# Altium PCB P8.PcbDoc (part 1 of 2)
Units mil, origin at the board's own origin, x right, y up, seen from the top; angles counter-clockwise.
Board outline 3346.46 x 1968.5 mil, 4 copper layers (Top Layer, MidLayer1, Mid-Layer 2, Bottom Layer); 75 components, 59 nets, 241 pads, 150 vias.
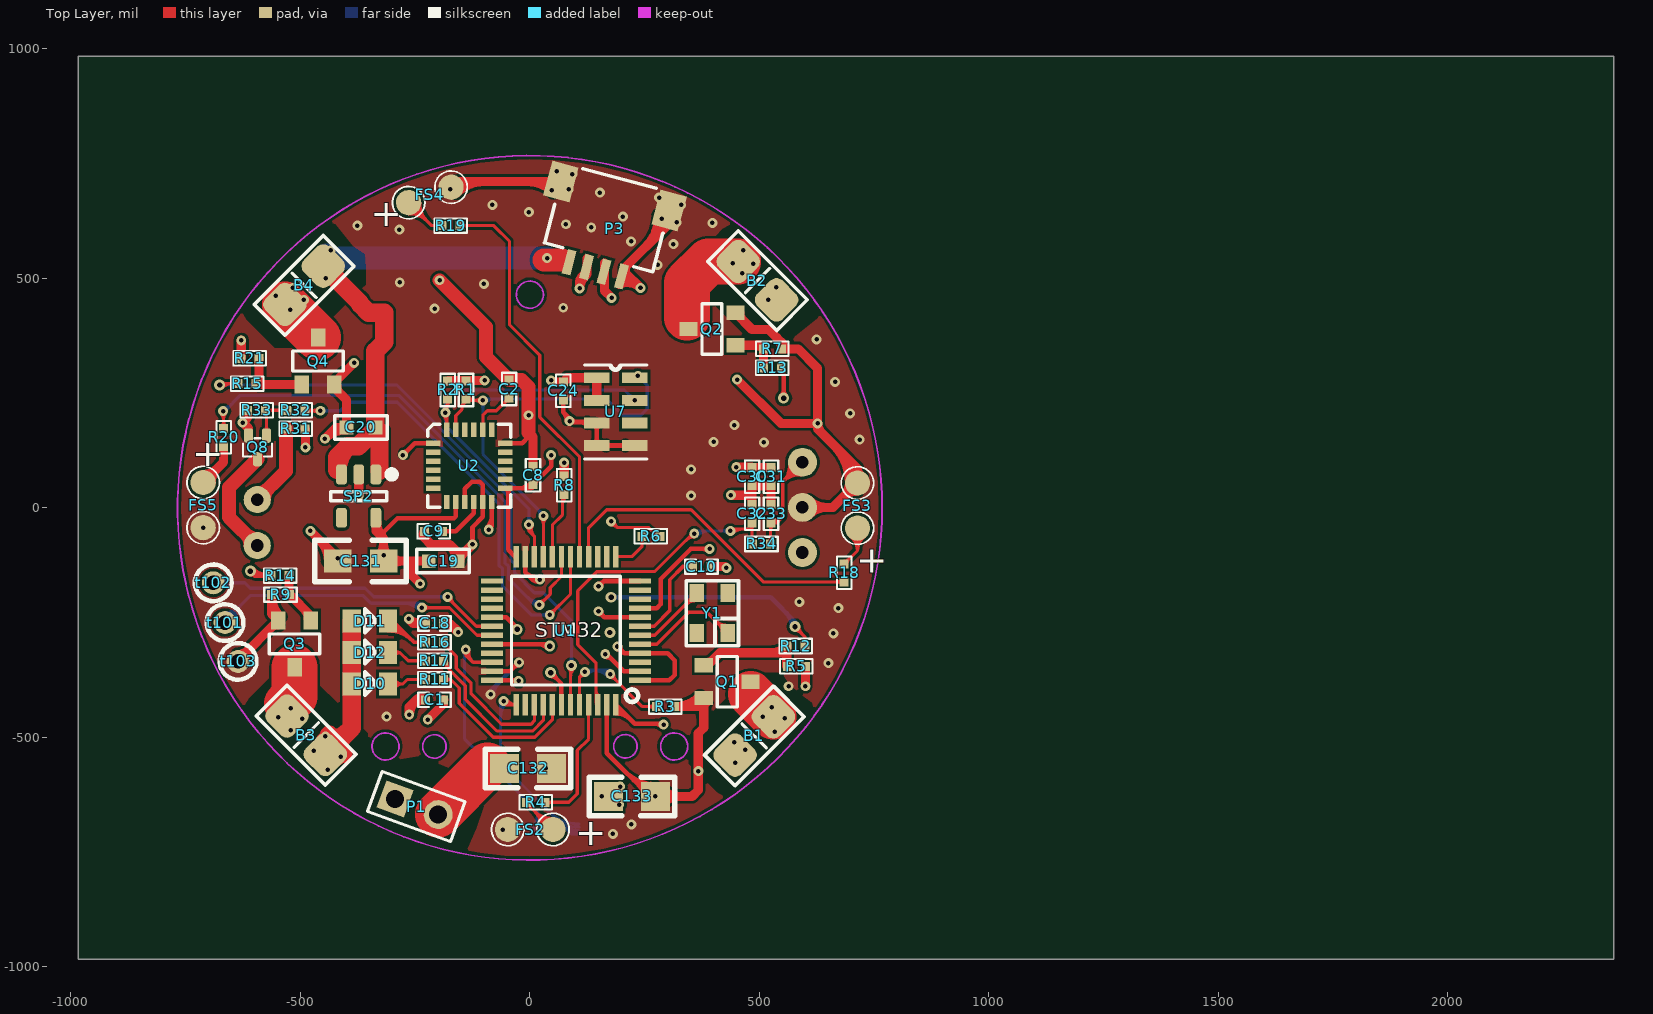
[diagram p0: Top Layer view]
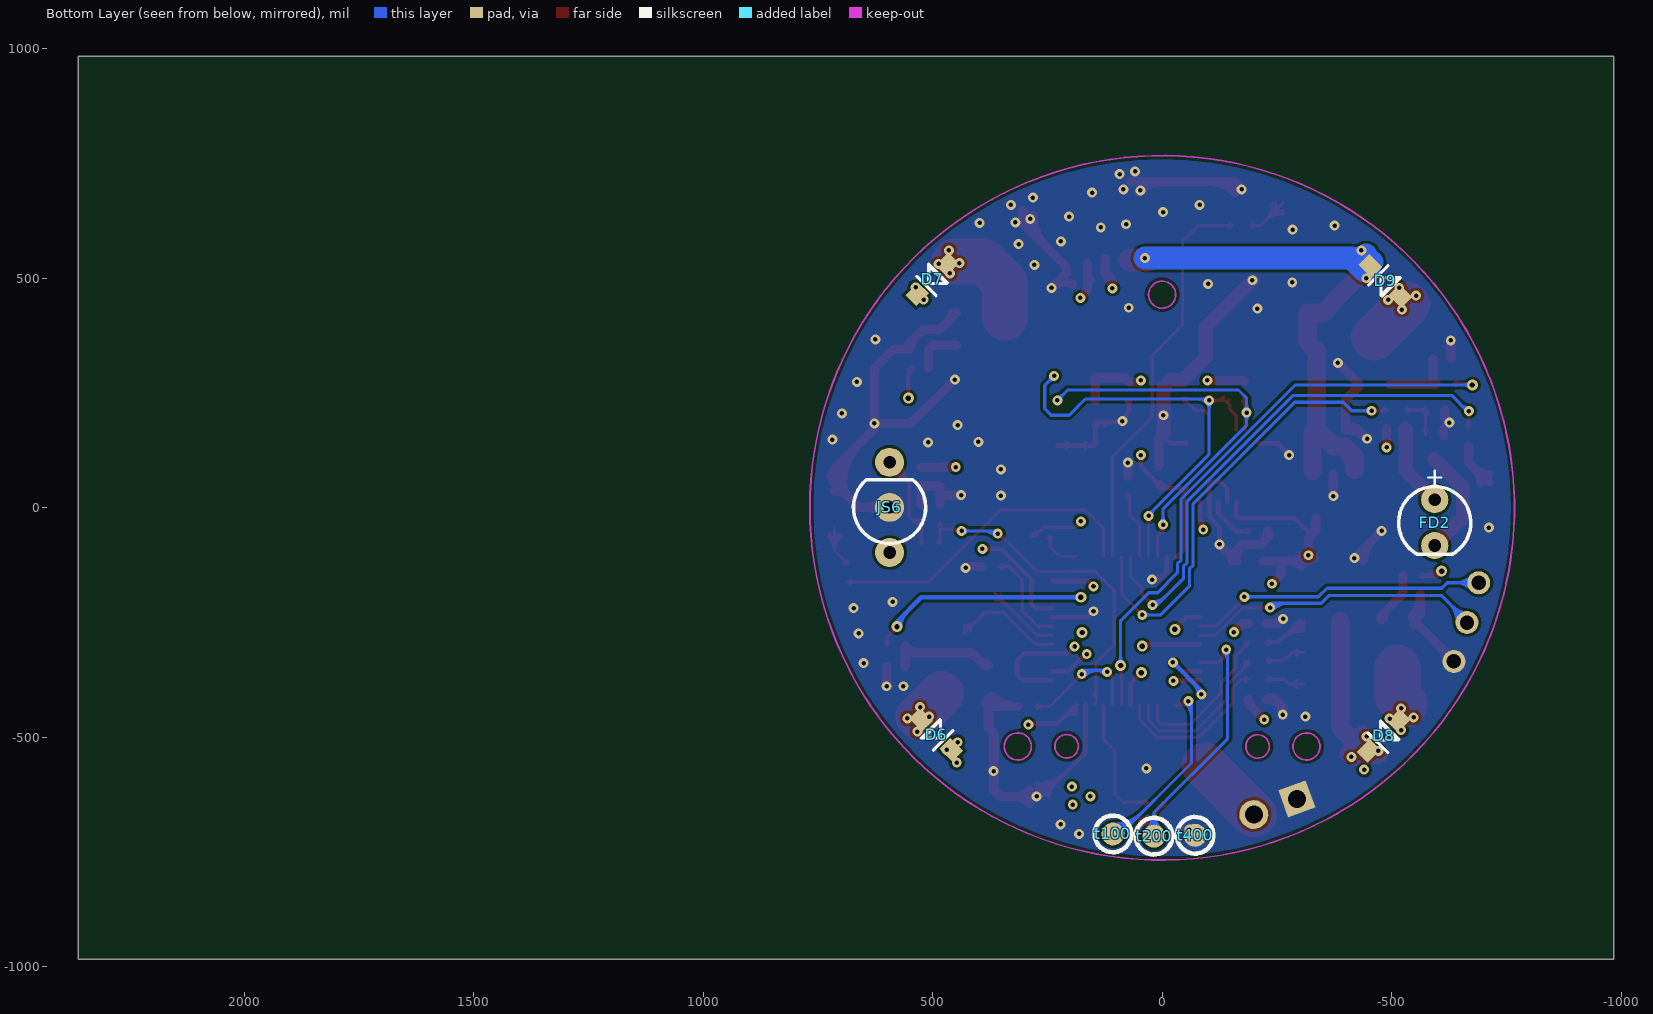
[diagram p1: Bottom Layer view, seen from below]
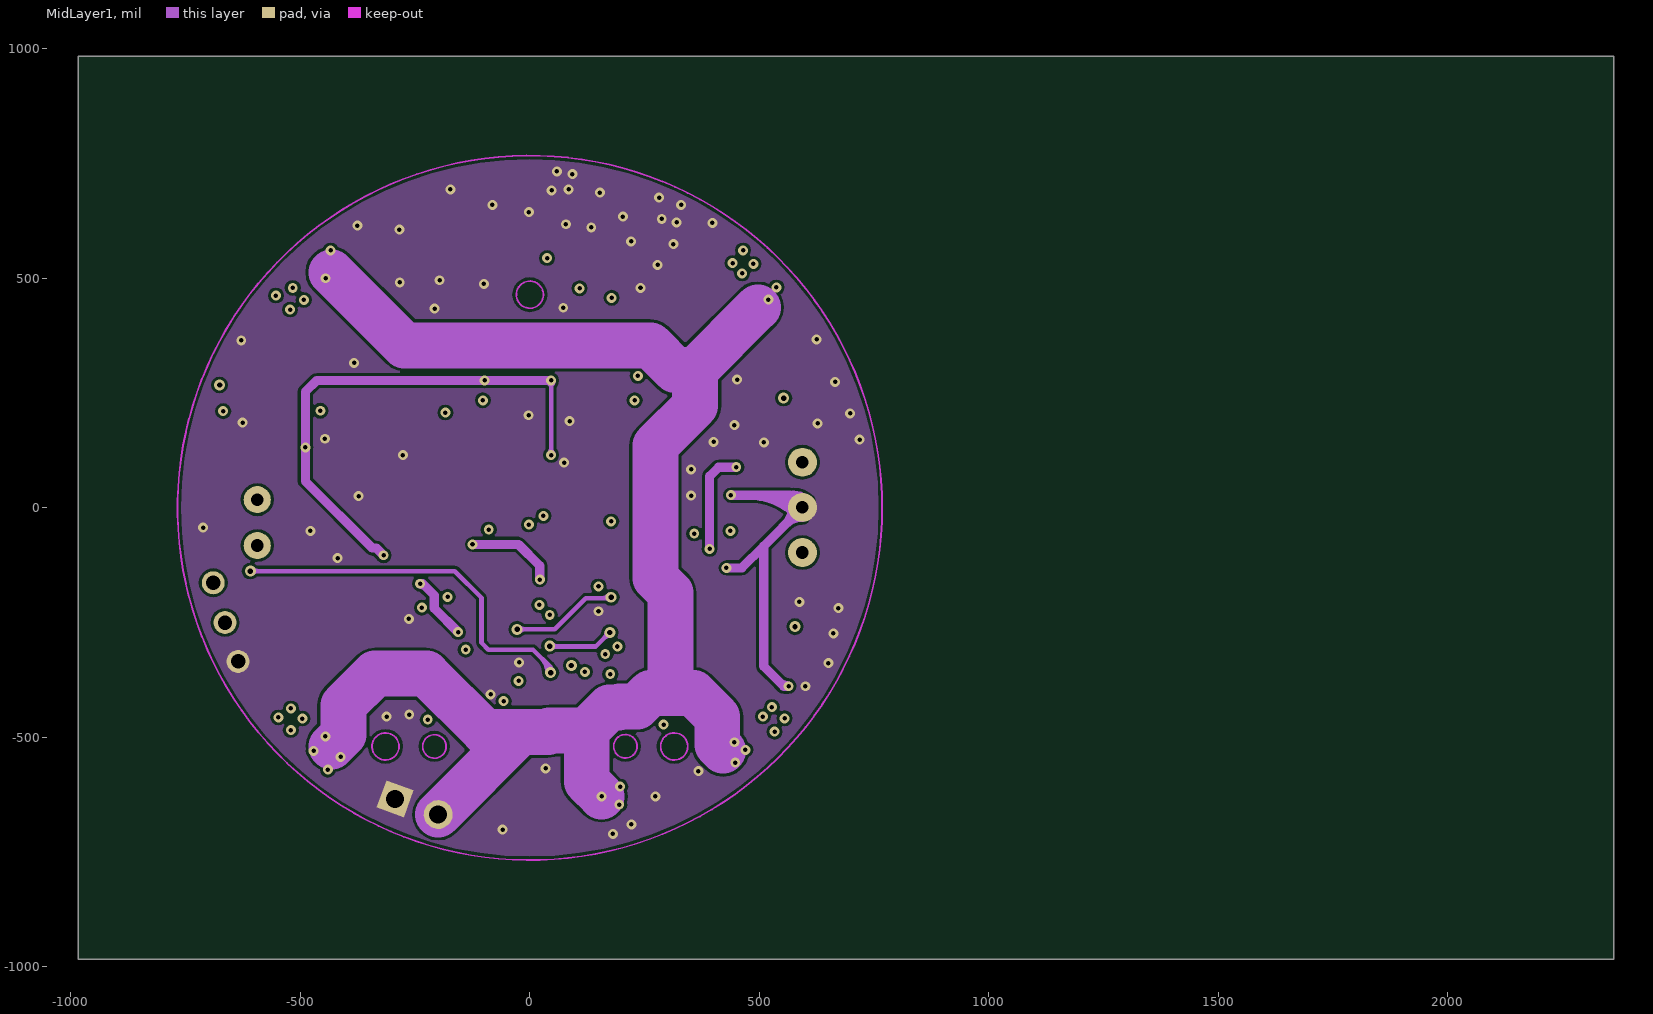
[diagram p2: MidLayer1]
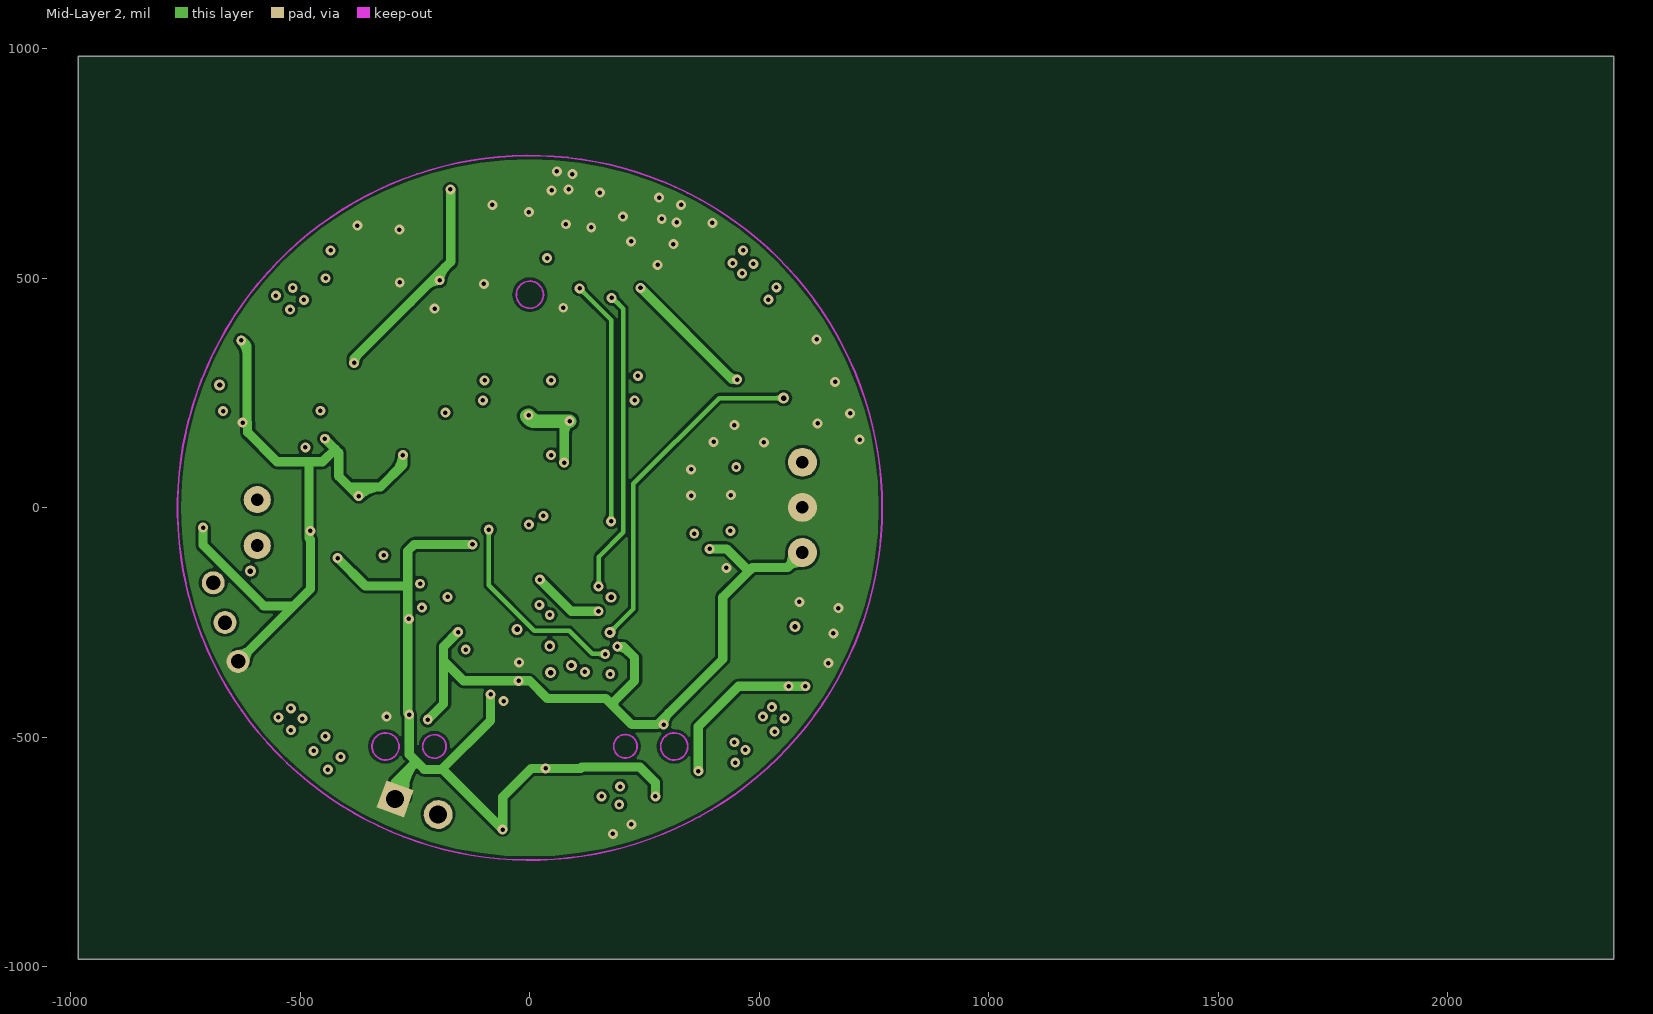
[diagram p3: Mid-Layer 2]

## Layer stack, top to bottom
Top Layer: signal copper 1.4
Dielectric: core 12.6, FR-4, Dk 4.8
MidLayer1: signal copper 1.4
Dielectric: prepreg 12.6, FR-4, Dk 4.8
Mid-Layer 2: signal copper 1.4
Dielectric: core 12.6, FR-4, Dk 4.8
Bottom Layer: signal copper 1.4

## Board outline
-984.25,984.25 2362.2,984.25 2362.2,-984.25 -984.25,-984.25

## Design rules (kind name [scope] priority, off if disabled: settings)
Clearance [All] p1: gap=6
ComponentClearance [All] p1: gap=0 collisioncheckmode=3 verticalgap=0 showdistances=FALSE
HoleToHoleClearance [All] p1: gap=0 allowstackedmicrovias=FALSE
MinimumSolderMaskSliver [All] p1: minsoldermaskwidth=0
PlaneConnect [All] p1: planeconnectstyle=Direct reliefexpansion=20 reliefentries=4 reliefconductorwidth=10 reliefairgap=10
PolygonConnect [All] p1: connectstyle=Direct reliefconductorwidth=10 reliefentries=4 polygonreliefangle="90 Angle" airgapwidth=10
RoutingVias [All] p1: holewidth=9.84 width=21.65 viastyle="Through Hole" minholewidth=9.84 minwidth=21.65 maxholewidth=19.68 maxwidth=59.06
SilkToSilkClearance [All] p1: silktosilkclearance=0
SilkToSolderMaskClearance [IsPad] p1: minsilkscreentomaskgap=0 clearancetoexposedcopper=TRUE
SolderMaskExpansion [All] p1: expansion=4
Width [All] p1: maxlimit=100 minlimit=7 preferedwidth=10 toplayer_prefwidth=7 midlayer1_minwidth=10 midlayer2_minwidth=10 bottomlayer_prefwidth=7 minimp=50.000000 maximp=50.000000 favimp=50.000000
22 further rules are at their usual default settings.

## Components (designator, comment, footprint, x,y, rotation, side; value= is the part's Value field where it differs from the comment)
B1 "Motor" Motor-3.0 489.02,-497.01 r225 top
B2 "Motor" Motor-3.0 495.98,495 r135 top
B3 "Motor" Motor-3.0 -487.48,-495.39 r135 top
B4 "Motor" Motor-3.0 -492.01,485 r45 top
C1 "104" C-0402 -207.68,-418.31 r0 top
C2 "C2.2nF" C-0402 -45.28,258.86 r90 top
C8 "104" C-0402 6.89,70.87 r270 top
C9 "104" C-0402 -209.65,-51.18 r0 top
C10 "C1uF" C-0402 374.02,-127.95 r0 top
C18 "104" C-0402 -207.68,-251.97 r0 top
C19 "C10uF" 0603C -220.47,-116.14 r0 top
C20 "C1uF" 0603C -399.61,175.2 r0 top
C24 "C0.1uF" C-0402 72.83,254.92 r90 top
C30 "2.2uF" C-0402 484.25,67.91 r270 top
C31 "100nF" C-0402 525.58,67.91 r270 top
C32 "2.2nF" C-0402 484.26,-12.8 r90 top
C33 "2.2nF" C-0402 525.59,-12.8 r90 top
C131 "22uF" 0805 -318.9,-116.14 r180 top
C132 "100uF" 1206 -55.12,-567.91 r0 top
C133 "100uF" 1206 171.26,-628.94 r0 top
D6 "BAT54WS" LC-SOD-323F 492.13,-494.09 r45 bottom
D7 "BAT54WS" LC-SOD-323F 500.98,498.03 r135 bottom
D8 "BAT54WS" LC-SOD-323F -483.27,-497.05 r135 bottom
D9 "BAT54WS" LC-SOD-323F -486.22,494.09 r225 bottom
D10 "LED-B" LED -387.79,-383.86 r0 top
D11 "LED-R" LED -387.79,-247.05 r0 top
D12 "LED-G" LED -387.79,-315.45 r0 top
FD2 "" LED-3 -594.02,-32.12 r270 bottom locked
FS2 "LED-RS" PAD-2 0.98,-700.98 r180 top
FS3 "LED-RS" PAD-2 714.02,5 r90 top
FS4 "LED-RS" PAD-2 -217.95,682.01 r20 top
FS5 "LED-RS" PAD-2 -712.01,5.98 r270 top
JS6 "LF0038G" LED-CA 594.02,0.98 r90 bottom locked
P1 "Head2" HEAD2 -199.8,-668.31 r70 top
P3 "Head*4" B2BC-1.0-4P 267.72,514.76 r75 top
Q1 "SI2302" SOT-23-3 378.94,-343.5 r270 top
Q2 "SI2302" SOT-23-3 447.83,354.33 r90 top
Q3 "SI2302" SOT-23-3 -477.36,-245.08 r180 top
Q4 "SI2302" SOT-23-3 -497.05,268.7 r0 top
Q8 "MMBT2222AT" SOT-523 -593.5,131.89 r180 top
R1 "R10K" R-0402 -139.27,256.89 r90 top
R2 "R10K" R-0402 -179.13,256.89 r90 top
R3 "R10K" R-0402 295.28,-433.07 r0 top
R4 "180R" R-0402 12.8,-641.73 r0 top
R5 "R10K" R-0402 580.71,-345.47 r0 top
R6 "R220" R-0402 263.78,-62.01 r180 top
R7 "R10K" R-0402 528.54,346.46 r180 top
R8 "R10K" R-0402 74.8,49.21 r270 top
R9 "R10K" R-0402 -543.31,-188.98 r0 top
R11 "R2K" R-0402 -207.68,-374.02 r0 top
R12 "R100R" R-0402 579.72,-301.18 r0 top
R13 "R100R" R-0402 528.54,305.12 r0 top
R14 "R100R" R-0402 -544.29,-147.64 r180 top
R15 "R100R" R-0402 -616.14,270.67 r180 top
R16 "R2K" R-0402 -207.68,-292.65 r0 top
R17 "R2K" R-0402 -207.68,-333.33 r0 top
R18 "180R" R-0402 685.04,-141.73 r270 top
R19 "180R" R-0402 -172.24,615.16 r0 top
R20 "180R" R-0402 -667.32,153.54 r90 top
R21 "R10K" R-0402 -610.24,325.79 r0 top
R31 "22R" R-0402 -509.84,172.25 r0 top
R32 "2.2K" R-0402 -509.84,212.6 r180 top
R33 "10K" R-0402 -595.47,212.6 r0 top
R34 "100R" R-0402 504.92,-78.74 r180 top
SP2 "SP6201-adj" SOT23-5 -373.03,25.59 r270 top
t100 "TP" TESTPOINT#1 107.28,-710.63 r90 bottom
t101 "TP" TESTPOINT#2 -664.37,-250 r90 top
t102 "TP" TESTPOINT#2 -689.96,-163.39 r90 top
t103 "TP" TESTPOINT#2 -635.83,-334.65 r90 top
t200 "TP" TESTPOINT#1 17.72,-715.55 r90 bottom
t400 "TP" TESTPOINT#1 -71.85,-713.58 r90 bottom
U1 "STM32F103C8T6" STM32C8T6 45.28,-342.52 r0 top
U2 "MPU6050" QFN24-1 -210.63,140.75 r270 top
U7 "MS5611" MS5611 145.67,283.46 r0 top
Y1 "12M" XTAL3225 442.91,-288.39 r90 top

## Footprints (in the part's own frame and the unit in brackets; to place one, negate y for a bottom-side part, rotate by r counter-clockwise, add the part's x,y. Pads: shape width x height; smd on the part's side, far side on the other; paste and mask are expansions set on the pad)
0603C [mil]
  rect 30x30 smd: 1(0,0) 2(62.99,0)
  silkscreen extent -26,-26 89,26
0805 [mil]
  rect 60x50 smd: 1(0,0) 2(100,0)
  silkscreen extent -50,-45 150,45
1206 [mm]
  rect 1.6x1.6 smd: 1(0,0) 2(2.6,0)
  silkscreen extent -1.07,-1.08 3.68,1.08
B2BC-1.0-4P [mm]
  rect 2x1.5 smd: 0(3.5,6.2) 0(3.5,0)
  rect 1.4x0.5 smd: 1(-0.7,1.6) 2(-0.7,2.6) 3(-0.7,3.6) 4(-0.7,4.6)
  silkscreen extent 0,0 4.5,6.2
C-0402 [mm]
  rect 0.5x0.5 smd mask+0.05: 1(-0.5,0) 2(0.5,0)
  silkscreen extent -0.9,-0.4 0.9,0.4, body extent -0.5,-0.25 0.5,0.25, height 0.5
HEAD2 [mm]
  rect 1.6x1.6 hole 1: 1(0,2.54)
  round 1.6 hole 1: 2(0,0)
  silkscreen extent -1.18,-1.15 1.17,3.72
LC-SOD-323F [mm]
  rect 1x0.83 smd: 1(1.18,0) 1(1.18,0.025) 2(-1.18,0.025) 2(-1.18,0)
  silkscreen extent -0.5,-0.8 0.45,0.72, body extent -1.4,-0.67 1.4,0.68, height 0.75
LED [mil]
  rect 40x50 smd: 1(0,0) 2(78.74,0)
  silkscreen extent 29,-25 49,27
LED-3 [mm]
  round 1.5 hole 0.7 mask+0.05: 1(-1.27,0) 2(1.27,0)
  silkscreen extent -2.88,-2 1.75,2, body extent -2.08,-2.1 2.1,2.1, height 13
LED-CA [mm]
  round 1.6 hole 0.7 mask+0.05: 1(2.5,0) 2(0,0) 3(-2.5,0)
  silkscreen extent -2,-2 1.53,2, body extent -2.98,-2.99 3,2.99, height 15.5
Motor-3.0 [mm]
  rrect50% 2x2 smd mask+0.05: 1(-1.5,0) 2(1.5,0)
  silkscreen extent -2.7,-1.2 2.7,1.2, body extent -2.2,-0.7 2.2,0.7, height 0.5
MS5611 [mm]
  rect 1.4x0.6 smd: 1(0,0) 2(0,-1.25) 3(0,-2.5) 4(0,-3.75) 5(2.1,-3.75) 6(2.1,-2.5) 7(2.1,-1.25) 8(2.1,0)
  silkscreen extent -0.67,-4.5 2.77,0.7
PAD-2 [mm]
  round 1.4 smd mask+0.05: 1(-1.25,0) 2(1.25,0)
  silkscreen extent -2.15,-0.9 2.15,0.9, body extent -1.76,-0.51 1.74,0.49, height 0.5
QFN24-1 [mm]
  rect 0.3x0.8 smd: 1(0,0) 2(0.5,0) 3(1,0) 4(1.5,0) 5(2,0) 6(2.5,0) 13(2.5,4) 14(2,4) 15(1.5,4) 16(1,4) 17(0.5,4) 18(0,4)
  rect 0.8x0.3 smd: 7(3.25,0.75) 8(3.25,1.25) 9(3.25,1.75) 10(3.25,2.25) 11(3.25,2.75) 12(3.25,3.25) 19(-0.75,3.25) 20(-0.75,2.75) 21(-0.75,2.25) 22(-0.75,1.75) 23(-0.75,1.25) 24(-0.75,0.75)
  silkscreen extent -1.05,-0.3 3.55,4.3
R-0402 [mm]
  rect 0.5x0.5 smd mask+0.05: 1(-0.5,0) 2(0.5,0)
  silkscreen extent -0.9,-0.4 0.9,0.4, body extent -0.5,-0.25 0.5,0.25, height 0.5
SOT23-5 [mm]
  rrect50% 1.1x0.6 smd mask+0.05: 1(-1.2,0.95) 2(-1.2,0) 3(-1.2,-0.95) 4(1.2,-0.95) 5(1.2,0.95)
  silkscreen extent -1.4,-1.55 0.25,2.02, body extent -1.5,-1.55 1.5,1.55, height 1.45
SOT-23-3 [mm]
  rect 0.8x1 smd: 1(0,0) 2(1.8,0) 3(0.9,2.6)
  silkscreen extent -0.5,0.75 2.3,1.85
SOT-523 [mm] "SOT23, 3-Leads, Body 1.60x1.60mm, Pitch 0.50mm, IPC Medium Density"
  rrect50% 0.5x0.8 smd mask+0.05: 1(-0.5,-0.65) 2(0.5,-0.65) 3(0,0.65)
  silkscreen extent -0.8,-0.5 0.8,0.5, body extent -0.75,-0.45 0.75,0.45, height 0.9
STM32C8T6 [mm]
  rect 1.2x0.3 smd: 1(4.95,-0.85) 2(4.95,-0.35) 3(4.95,0.15) 4(4.95,0.65) 5(4.95,1.15) 6(4.95,1.65) 7(4.95,2.15) 8(4.95,2.65) 9(4.95,3.15) 10(4.95,3.65) 11(4.95,4.15) 12(4.95,4.65) 25(-3.25,4.65) 26(-3.25,4.15) 27(-3.25,3.65) 28(-3.25,3.15) 29(-3.25,2.65) 30(-3.25,2.15) 31(-3.25,1.65) 32(-3.25,1.15) 33(-3.25,0.65) 34(-3.25,0.15) 35(-3.25,-0.35) 36(-3.25,-0.85)
  rect 0.3x1.2 smd: 13(3.6,6) 14(3.1,6) 15(2.6,6) 16(2.1,6) 17(1.6,6) 18(1.1,6) 19(0.6,6) 20(0.1,6) 21(-0.4,6) 22(-0.9,6) 23(-1.4,6) 24(-1.9,6) 37(-1.9,-2.2) 38(-1.4,-2.2) 39(-0.9,-2.2) 40(-0.4,-2.2) 41(0.1,-2.2) 42(0.6,-2.2) 43(1.1,-2.2) 44(1.6,-2.2) 45(2.1,-2.2) 46(2.6,-2.2) 47(3.1,-2.2) 48(3.6,-2.2)
  silkscreen extent -2.16,-2.05 4.85,4.92
TESTPOINT#1 [mil]
  round 50 smd: 1(0,0)
  silkscreen extent -40,-40 40,40
TESTPOINT#2 [mil]
  round 50 hole 31.5: 1(0,0)
  silkscreen extent -40,-40 40,40
XTAL3225 [mm]
  rect 1x0.8 smd: 1(0.4,0.3) 2(2.6,0.3) 3(2.6,2) 4(0.4,2)
  silkscreen extent -0.3,-0.3 3.3,2.6

## Part data
B1 B2 B3 B4: "Motor, General Kind"
C1 C2 C8 C9 C10 C18 C20: library part C0.1uF
C30 C31 C32 C33: library part CAP, "Capacitor"
C131 C132 C133: library part C100uF
D6 D7 D8 D9: library part Diode
D10 D11 D12: library part LED
FD2: library part LED3, "Typical BLUE SiC LED"
FS2 FS3 FS4 FS5: library part LED-SM
Q1 Q2 Q3 Q4: library part MOSFET-N
Q8: library part NPN[SOT-23], "EBC"
R4 R18 R19 R20 R31 R32 R33 R34: library part Res, "Resistor"
R6: library part R10K
R11 R16 R17: library part R1K
SP2: library part SP6201
Y1: library part CRYSTAL, "Crystal"

## Via types
v1: diameter 21.65, hole 9.84, Top Layer to Bottom Layer, 140 vias
v2: diameter 23.82, hole 11.81, Top Layer to Bottom Layer, 10 vias

## Nets (pads, with @x,y where several pads share a name; then routed paths per layer and width w, separated by ;. In a path a pad name is that pad's centre, name@x,y a point inside that pad or via, vN(x,y) a via of type N, cw(c..) or ccw(c..) an arc to the next point about the centre after c; other vN are vias at no path point)
2V8: C1.2 C8.2 C18.2 C19.1 C24.2 C30.1 C31.1 C131.1 JS6.3 R1.2 R2.2 R31.2 SP2.5 U1.1 U1.4 U1.9 U1.24 U1.36 U1.48 U2.8 U2.13 U7.1 U7.2 | length 5689.6
  Top Layer w10: -318.9,-66.93 -318.9,-53.15 -288.39,-22.64 -165.35,-22.64 -161.42,-18.7 U2.8@-161.42,12.8 ; U1.36@-82.68,-375.98 -25.59,-375.98 v1(-24.61,-376.97) ; -47.24,30.63 cw(c-31.62,30.63) U2.13@-42.67,41.68 ; -41.05,-375.98 cw(c-41.05,-393.41) v1@-28.73,-381.09 ; -36.3,-375.98 ccw(c-36.3,-365.28) v1@-28.73,-372.85 ; U1.24@-29.53,-106.3 -32.48,-106.3 -47.24,-91.54 -47.24,36.42 U2.13@-53.15,42.32 -1.96,42.32 C8.2@6.9,51.18 46.26,90.54 v1(46.26,115.16) ; -26.17,42.32 ccw(c-26.17,84.24) C8.2@3.47,54.6 ; C8.2@-2.02,42.32 ccw(c-2.02,60.1) C8.2@10.54,47.53 ; C8.2@6.9,56.02 ccw(c6.9,67.71) 15.16,59.44 ccw(c23.43,51.18) C8.2@11.74,51.18 ; v1@42.14,111.04 cw(c32.19,101.09) 46.26,101.09 cw(c60.33,101.09) v1@50.38,111.04 ; U1.48@187.01,-447.76 cw(c187.01,-492.71) 218.8,-460.92 ; U1.48@187.01,-437.76 cw(c187.01,-458.57) 201.73,-443.85 ; U1.48@187.01,-429.13 228.35,-470.47 v1@291.34,-470.47 ; v1@190.94,-307.99 cw(c190.94,-322.06) 200.89,-312.11 cw(c210.84,-302.17) v1@196.77,-302.17 ; v1(190.94,-302.17) 205.71,-316.93 U1.4@240.16,-316.93 300.2,-316.93 315.94,-332.68 315.94,-364.17 304.13,-375.98 U1.1@240.16,-375.98 ; U1.9@240.16,-218.5 276.57,-218.5 285.43,-209.65 285.43,-154.97 350.83,-89.57 v1(391.73,-89.57) ; 272.52,-470.47 cw(c272.52,-491.26) v1@287.22,-476.56 ; v1@387.61,-93.69 ccw(c377.67,-103.63) 377.67,-89.57 ccw(c377.67,-75.5) v1@387.61,-85.45
  Top Layer w20: R31.2@-490.15,172.25 -489.17,171.27 v1(-489.17,131.89) ; SP2.5@-335.63,-21.65 -335.63,-50.2 -318.9,-66.93 v1(-318.9,-103.35) C131.1@-318.9,-116.14 -258.86,-116.14 ; SP2.5@-333.82,-31.5 ccw(c-284.3,-31.5) -319.32,-66.51 ; C131.1@-331.84,-109.58 cw(c-321.85,-115.35) C131.1@-319.1,-104.15 ; C131.1@-329.5,-105.54 ccw(c-355.11,-79.93) -318.9,-79.93 ccw(c-282.68,-79.93) C131.1@-308.29,-105.54 ; C131.1@-318.7,-104.15 cw(c-315.94,-115.35) C131.1@-305.96,-109.58 ; C131.1@-318.31,-102.76 ccw(c-286.01,-70.46) -286.01,-116.14 ; C131.1@-303.29,-126.75 cw(c-277.68,-152.36) -277.68,-116.14 cw(c-277.68,-79.93) C131.1@-303.29,-105.54 ; v1(-239.17,-165.35) -258.86,-145.67 -258.86,-116.14 ; v1(-222.44,-461.61) -187.99,-427.16 C1.2@-187.99,-418.3 ; C19.1@-220.47,-116.14 -258.86,-116.14 ; -193.98,-433.15 ccw(c-208.84,-418.3) C1.2@-187.83,-418.3 ; C18.2@-187.99,-251.96 -175.2,-251.96 v1(-156.5,-270.67) ; C18.2@-187.99,-251.8 cw(c-187.99,-282.3) -166.43,-260.74 ; R2.2@-179.13,276.58 -178.15,277.56 v1(-98.43,277.56) ; v1(46.26,277.56) 49.21,274.61 C24.2@72.83,274.61 81.68,283.46 U7.1@145.67,283.46 U7.2@145.67,234.25 ; C24.2@72.72,274.72 cw(c93.82,253.62) 93.82,283.46 ; v1(449.8,88.58) 483.27,88.58 C30.1@484.26,87.59 C31.1@525.59,87.59 ; -164.01,-262.13 cw(c-171.21,-274.61) -157.29,-270.88 ccw(c-171.21,-274.61) -164.01,-262.13
  MidLayer1 w10: v1@42.14,119.28 ccw(c32.19,129.22) 46.26,129.22 ccw(c60.33,129.22) v1@50.38,119.28 ; v1@42.14,273.44 cw(c32.19,263.49) 46.26,263.49 cw(c60.33,263.49) v1@50.38,273.44 ; v1(46.26,115.16) v1@46.26,273.62
  MidLayer1 w20: v1(-318.9,-103.35) -334.65,-87.6 -343.5,-87.6 -489.17,58.07 v1(-489.17,131.89) -489.17,252.95 -464.57,277.56 v1(-98.43,277.56) v1(46.26,277.56) v1@46.26,273.62 ; v1@-239.17,-166.18 cw(c-239.17,-181.27) -228.5,-170.6 ; v1(-239.17,-165.35) -233.75,-165.35 -208.41,-190.69 -208.41,-218.76 v1(-156.5,-270.67) ; v1(391.73,-89.57) 391.73,68.9 411.42,88.58 v1(449.8,88.58)
  Mid-Layer 2 w20: v1(-222.44,-461.61) -187.99,-427.16 -187.99,-339.9 ; v1(-156.5,-270.67) -187.99,-302.16 -187.99,-339.9 ; v1@190.94,-302.99 cw(c190.94,-335.88) 214.2,-312.62 ; v1(190.94,-302.17) 203.74,-302.17 228.35,-326.77 228.35,-376.97 183.07,-422.24 183.07,-433.07 ; v1@292.17,-472.44 cw(c327.43,-472.44) 302.49,-447.51 ; v1(391.73,-89.57) 429.13,-89.57 472.93,-133.37 472.93,-142.22 ; JS6.3@572.61,-99.37 cw(c534.44,-102.82) 561.54,-129.92 ; JS6.3@592.08,-118.85 ccw(c588.64,-157.02) 561.54,-129.92 ; JS6.3@594.02,-97.44 561.54,-129.92 ; -187.99,-339.9 -184.71,-336.61 -184.71,-336.95 -144.68,-376.97 v1(-24.61,-376.97) -0.54,-376.97 37.84,-415.35 165.35,-415.35 183.07,-433.07 ; 183.07,-433.07 222.44,-472.44 277.56,-472.44 420.28,-329.72 420.28,-194.88 472.93,-142.22 ; 472.93,-142.22 485.24,-129.92 561.54,-129.92
  other v1: 291.34,-472.44
4V3: B1.2 B2.1 B3.1 B4.2 C20.2 C132.1 C133.1 D6.2 D7.2 D8.2 D9.2 D10.1 D11.1 D12.1 P1.2 P3.4 SP2.1 SP2.3 | length 5645.3
  Top Layer w20: v1(37.4,544.29) 46.83,553.72
  Top Layer w40: B3.1@-471.46,-538.7 ccw(c-471.46,-480.31) B3.1@-430.17,-521.6 ; B4.2@-450.25,507.39 cw(c-450.25,460.62) -417.18,493.69 cw(c-384.12,526.76) B4.2@-430.88,526.76 ; B3.1@-445.72,-517.78 ccw(c-445.72,-471.02) -412.66,-504.09 ccw(c-379.59,-537.15) B3.1@-426.35,-537.15 ; B3.1@-445.72,-507.35 ccw(c-445.72,-435.4) -394.85,-486.28 ; B4.2@-445.16,509.53 cw(c-445.16,480.24) B4.2@-424.44,500.95 ; B3.1@-437.24,-494.68 cw(c-473.31,-509.56) B3.1@-445.72,-537.15 ; B4.2@-434.5,511.01 -370.08,446.59 -370.08,443.9 -351.38,425.2 -316.93,425.2 -316.93,361.38 -336.61,341.7 C20.2@-336.61,175.2 ; B3.1@-421.49,-542.72 cw(c-349.54,-542.72) -400.42,-491.85 ; SP2.3@-420.28,82.68 -420.28,110.24 -396.32,134.2 -373.84,134.2 -336.61,171.42 C20.2@-336.61,175.2 ; SP2.3@-418.62,82.68 cw(c-348.09,82.68) -397.96,132.55 ; B3.1@-406.29,-535.81 ccw(c-425.28,-557.59) B3.1@-445.72,-537.15 ; D11.1@-387.79,-247.05 D12.1@-387.79,-315.45 D10.1@-387.79,-383.86 -387.79,-479.22 B3.1@-445.72,-537.15 ; SP2.1@-327.76,80.3 -327.76,166.34 C20.2@-336.61,175.2
  Top Layer w50: v1@30.91,540.35 69.88,540.35
  Top Layer w100: P1.2@-199.8,-668.31 -92.52,-561.02
  MidLayer1 w100: -432.4,513.11 -273.52,354.23 262.92,354.23 316.95,300.2 360.24,300.2 ; -432.09,-519.69 -406.5,-494.09 -406.5,-430.22 -337.5,-361.22 -225.41,-361.22 -98.55,-488.09 -19.58,-488.09 ; P1.2@-199.8,-668.31 -19.58,-488.09 ; v1(156.5,-628.94) 123.9,-596.34 123.9,-484.78 ; 421.26,-529.02 408.46,-516.22 408.46,-455.71 356.3,-403.54 306.1,-403.54 ; 496.83,436.79 360.24,300.2 ; -19.58,-488.09 39.37,-488.09 42.32,-485.13 123.54,-485.13 123.9,-484.78 ; 123.9,-484.78 173.27,-435.41 193.53,-435.41 195.87,-433.07 233.27,-433.07 262.8,-403.54 306.1,-403.54 ; 306.1,-403.54 306.1,-185.04 273.62,-152.56 273.62,135.83 360.24,222.44 360.24,300.2
  Bottom Layer w50: D9.2@-451.7,521.34 ccw(c-451.7,560.18) -424.24,532.72 ; D9.2@-451,520.65 ccw(c-451,556.13) -425.92,531.04 ; -440.22,516.73 -412.67,544.29 v1(37.4,544.29) ; D9.2@-457.13,535.43 cw(c-435.75,514.05) -435.75,544.29 ccw(c-435.75,514.05) D9.2@-457.13,535.43 ; -444.08,551 ccw(c-427.88,567.2) -427.88,544.29 cw(c-427.88,567.2) -444.08,551
  other v1: 194.88,-646.65 196.85,-607.28 -440.15,-570.56 447.58,-555.34 -412.31,-542.72 -471.46,-529.53 469.49,-527.56 445.87,-510.83 -445.72,-498.18 519.68,453.74 537.4,480.31 -445.16,500.36 -434.06,561.02
DSM2: P3.3 R6.1 | length 915.2
  Top Layer w7: v1@177.17,-36.85 cw(c177.17,-54.54) 189.67,-42.04 cw(c202.18,-29.53) v1@184.49,-29.53 ; v1(177.17,-29.53) 190.3,-42.67 257.87,-42.67 277.22,-62.01 R6.1@283.47,-62.01 ; 261.97,-46.76 ccw(c283.47,-25.26) R6.1@283.47,-55.67 ; R6.1@273.92,-58.71 ccw(c283.47,-49.16) R6.1@283.47,-62.67
  Top Layer w20: v1(108.27,478.35) 108.27,493.11 124.67,509.51 P3.3@124.67,543.53 ; v1@108.27,481.95 cw(c144.86,481.95) P3.3@118.98,507.83 ; 108.27,489.53 cw(c129.25,489.53) P3.3@119.02,507.85 ; v1@109.09,478.35 cw(c146.73,478.35) P3.3@120.12,504.96
  Mid-Layer 2 w10: v1@108.27,472.52 cw(c108.27,458.45) 118.21,468.4 cw(c128.16,478.35) v1@114.09,478.35 ; v1(108.27,478.35) 177.17,409.45 v1(177.17,-29.53) ; v1@173.05,-25.41 ccw(c163.1,-15.46) 177.17,-15.46 ccw(c191.23,-15.46) v1@181.29,-25.41
FCS: U1.25
GND: C1.1 C2.2 C8.1 C9.1 C10.2 C18.1 C19.2 C20.1 C24.1 C30.2 C31.2 C32.2 C33.2 C131.2 C132.2 C133.2 FS2.2 FS3.2 FS4.2 FS5.2 JS6.2 P1.1 P3.0 P3.1 Q1.2 Q2.2 Q3.2 Q4.2 Q8.2 R3.2 R5.2 R7.1 R8.1 R9.1 R21.1 R33.1 SP2.2 t103.1 t400.1 U1.8 U1.23 U1.35 U1.47 U2.1 U2.9 U2.11 U2.18 U7.3 U7.4 U7.5 | length 13281.8
  Top Layer w10: v1@-277.56,116.14 -275.59,116.14 -250.98,140.75 U2.1@-210.63,140.75 ; v1@-276.57,120.98 ccw(c-276.57,135.05) -266.63,125.1 ccw(c-256.68,115.16) v1@-270.75,115.16 ; U2.9@-141.73,12.8 -141.73,41.34 -125.98,57.09 -109.25,57.09 -102.36,50.2 U2.11@-102.36,12.8 -102.36,-19.68 -125,-42.32 v1(-125,-79.72) ; v1@-129.12,-75.6 ccw(c-139.07,-65.66) -125,-65.66 ccw(c-110.93,-65.66) v1@-120.88,-75.6 ; U1.35@-82.68,-356.3 -43.31,-356.3 v1(-23.62,-336.61) ; U2.18@-53.15,140.75 -16.73,140.75 -2.85,154.63 -2.85,164.48 ; v1@-29.45,-336.61 cw(c-43.52,-336.61) -33.57,-346.56 cw(c-23.62,-356.51) v1@-23.62,-342.44 ; U1.23@-9.84,-106.3 -9.84,-140.75 ; 4.08,-154.68 ccw(c19.04,-139.72) v1@22.3,-160.62 ; v1@17.53,-160.62 ccw(c7.59,-170.56) 7.59,-156.5 ccw(c7.59,-142.43) v1@17.53,-152.38 ; v1@20.76,-150.74 cw(c15.29,-115.62) -9.84,-140.75 ; v1(21.65,-156.5) 5.91,-156.5 -9.84,-140.75 ; C24.1@69.4,231.82 cw(c61.14,223.55) 72.83,223.55 cw(c84.52,223.55) C24.1@76.25,231.82 ; C24.1@72.83,235.24 72.83,208.67 ; v1@80.79,189.06 ccw(c53.61,189.44) 72.83,208.67 ; v1@89.57,191.93 72.83,208.67 ; v1@90.73,193.1 ccw(c105.43,207.8) 105.43,187.01 ; v1@94.49,187.01 143.7,187.01 U7.3@145.67,185.04 U7.4@145.67,135.83 U7.5@228.35,135.83 ; 108.72,187.01 cw(c108.72,163.84) U7.3@125.1,180.22 ; U7.3@118.23,187.01 ccw(c118.23,196.73) U7.3@125.1,189.85 ; U7.4@140.85,140.64 ccw(c129.23,152.27) 145.67,152.27 ccw(c162.11,152.27) U7.4@150.48,140.64 ; U7.3@140.85,180.22 cw(c129.23,168.6) 145.67,168.6 cw(c162.11,168.6) U7.3@150.48,180.22 ; v1@149.61,-231.22 cw(c149.61,-245.29) 159.55,-235.34 cw(c169.5,-225.39) v1@155.43,-225.39 ; v1(149.61,-225.39) 162.4,-238.19 U1.8@240.16,-238.19 ; U7.4@166.23,131.01 cw(c177.86,119.38) 177.86,135.83 cw(c177.86,152.27) U7.4@166.23,140.64 ; U1.47@167.32,-429.13 167.32,-534.45 C133.2@261.81,-628.94 ; U7.5@207.78,131.01 ccw(c196.16,119.38) 196.16,135.83 ccw(c196.16,152.27) U7.5@207.78,140.64 ; 208.23,-575.35 ccw(c273.62,-509.96) C133.2@273.62,-602.44 ; 225.3,-592.42 ccw(c273.62,-544.1) C133.2@273.62,-612.44 ; 236.74,-603.87 cw(c211.68,-628.94) C133.2@247.13,-628.94 ; C133.2@242.37,-609.49 ccw(c273.62,-578.24) C133.2@273.62,-622.44 ; C133.2@243.51,-610.64 ccw(c273.62,-580.53) C133.2@273.62,-623.11 ; C133.2@247.03,-615.31 cw(c237.84,-649.59) C133.2@268.58,-631.85 ; C133.2@260.58,-627.71 ccw(c273.62,-614.67) C133.2@273.62,-633.11 ; C133.2@269,-632.48 ccw(c261.81,-637.99) C133.2@261.81,-628.94 ; C133.2@269,-625.39 cw(c261.81,-619.88) C133.2@261.81,-628.94 ; v1(273.62,-628.94) C133.2@261.81,-628.94
  Top Layer w20: t103.1@-635.83,-334.65 -635.83,-332.68 Q3.2@-548.23,-245.08 -562.99,-230.32 R9.1@-562.99,-188.98 ; t103.1@-635.83,-319.65 ccw(c-635.83,-288.18) -613.58,-310.43 ; R21.1@-629.92,325.79 -628.94,326.77 v1(-628.94,365.16) ; t103.1@-620.83,-334.65 cw(c-579.86,-334.65) -608.83,-305.68 ; R33.1@-615.15,212.6 -615.15,196.85 v1(-626.02,185.99) -613.19,173.15 Q8.2@-613.19,157.49 ; -564.76,-261.61 cw(c-548.23,-278.15) Q3.2@-548.23,-254.76 ; R9.1@-562.99,-191.62 ccw(c-498.71,-191.62) Q3.2@-544.16,-237.08 ; v1(-478.35,-50.2) v1(-418.9,-109.65) ; -457.63,-70.91 cw(c-502.87,-116.14) C131.2@-438.9,-116.14 ; v1(-446.85,150.59) -422.25,175.2 C20.1@-399.61,175.2 -399.61,235.24 -426.18,261.81 Q4.2@-426.18,268.7 -426.18,272.64 v1(-382.87,315.94) ; v1@-446.79,150.65 cw(c-399.61,103.47) C20.1@-399.61,170.2 ; Q4.2@-420.43,264.76 ccw(c-399.43,264.76) Q4.2@-414.28,249.91 ; v1(-373.03,25.59) SP2.2@-373.03,72.83 ; v1(-263.78,-242.13) -253.94,-251.96 C18.1@-227.36,-251.96 ; v1@-263.19,-241.54 ccw(c-238.04,-216.38) -238.04,-251.96 ; v1(-262.8,-450.79) -262.8,-434.06 -247.04,-418.3 ; v1@-261.97,-450.79 cw(c-219.58,-450.79) -249.55,-420.81 ; -260.69,-431.95 cw(c-227.36,-465.28) C1.1@-227.36,-418.14 ; C9.1@-229.48,-51.17 ccw(c-194.19,-51.17) -219.14,-76.13 ; C9.1@-229.44,-51.06 ccw(c-221.82,-58.45) -229.32,-65.95 ; C9.1@-229.32,-51.17 -229.32,-65.95 ; C1.1@-227.36,-418.3 -247.04,-418.3 ; C1.1@-227.25,-418.19 ccw(c-237.09,-428.25) -247.04,-418.3 ; FS4.2@-171.71,698.84 -159.51,711.04 P3.0@67.6,711.04 ; C19.2@-162.45,-115.63 ccw(c-206.53,-111.06) -175.2,-79.73 ; FS4.2@-159.29,686.42 cw(c-99.86,626.99) -99.86,711.04 ; C19.2@-157.48,-116.14 C19.2@-157.48,-112.2 ; C19.2@-152.48,-116.14 cw(c-130.9,-116.14) -146.16,-100.88 ; v1(-125,-79.72) C19.2@-157.48,-112.2 ; v1(-59.25,-700.98) FS2.2@-48.23,-700.98 ; -5.04,711.04 cw(c-5.04,631.44) P3.0@51.25,687.72 ; -2.85,164.48 6.9,154.73 C8.1@6.9,90.55 ; R8.1@74.8,68.9 v1(74.8,98.41) ; P3.1@195.09,487.48 cw(c212.29,450.48) v1(241.14,479.33) 208.17,512.3 208.17,524.11 303.38,619.33 P3.0@303.38,647.86 ; 252.24,568.18 ccw(c182.07,638.36) P3.0@281.31,638.36 ; v1(273.62,-628.94) 353.35,-628.94 367.13,-615.16 v1(367.13,-573.82) 367.13,-491.14 378.94,-479.33 Q1.2@378.94,-414.37 360.24,-433.07 R3.2@314.96,-433.07 ; 286.38,602.33 ccw(c250.35,638.36) P3.0@301.31,638.36 ; C133.2@288.82,-644.14 cw(c325.52,-680.83) 325.52,-628.94 cw(c325.52,-577.04) C133.2@288.82,-613.74 ; R3.2@315.98,-433.07 ccw(c315.98,-355.34) Q1.2@370.94,-410.31 ; 362.4,-430.9 ccw(c345.87,-414.37) Q1.2@369.25,-414.37 ; 364.26,-433.07 ccw(c364.26,-403.63) Q1.2@385.08,-424.45 ; C10.2@393.71,-127.95 425.19,-127.95 v1(428.15,-130.91) ; v1(437.99,27.56) 484.25,27.56 ; Q2.2@447.83,425.2 484.25,388.78 520.67,388.78 548.23,361.22 ; v1(451.77,279.53) 547.24,184.06 v1(626.97,184.06) ; Q2.2@457.52,425.2 ccw(c480.9,425.2) 464.37,408.66 ; C32.2@484.26,6.9 484.26,27.56 ; C33.2@525.58,6.9 C31.2@525.59,48.22 C30.2@484.26,48.22 484.26,27.56 ; 538.06,371.39 cw(c513.13,346.46) R7.1@548.39,346.46 ; R7.1@548.34,346.35 ccw(c540.74,353.72) 548.23,361.22 ; JS6.2@594.02,0.98 660.79,0.98 FS3.2@714.02,54.21 714.02,85.2 ; v1(600.39,-388.78) R5.2@600.39,-345.47 ; JS6.2@609.22,-14.22 cw(c645.91,-50.91) 645.91,0.98 cw(c645.91,52.88) JS6.2@609.22,16.18 ; v1@627.8,184.06 ccw(c658.31,184.06) 636.73,162.48 ; 662.13,137.08 cw(c579.27,54.21) 696.46,54.21 cw(c654.07,54.21) 684.04,24.24 cw(c714.02,-5.74) FS3.2@714.02,36.65 ; 696.27,102.94 cw(c647.55,54.21) FS3.2@716.46,54.21 ; FS3.2@704.99,69.28 ccw(c695.46,85.2) 714.02,85.2 ; FS3.2@723.04,69.28 cw(c732.57,85.2) 714.02,85.2 ; -229.32,-65.95 -215.55,-79.72 -175.2,-79.72 ; -175.2,-79.72 -157.48,-97.44 C19.2@-157.48,-112.2 ; 548.23,361.22 R7.1@548.23,346.46 584.65,346.46 626.97,304.13 v1(626.97,184.06) ; v1(626.97,184.06) 626.97,172.24 714.02,85.2
  Top Layer w30: v1(-196.85,496.06) -95.47,394.68 -95.47,328.74 C2.2@-45.28,278.55 -17.62,278.55 -2.85,263.78 v1(-2.85,201.77) -2.85,164.48
  MidLayer1 w20: v1(-125,-79.72) -24.61,-79.72 21.65,-125.98 v1(21.65,-156.5) ; v1(428.15,-130.91) 462.13,-130.91 509.61,-83.42 ; v1(437.99,27.56) 567.44,27.56 JS6.2@594.02,0.98 ; 477.96,27.56 cw(c477.96,-115.07) JS6.2@578.82,-14.22 ; 526.25,27.56 cw(c526.25,-66.79) JS6.2@592.96,-0.07 ; 544.08,-379.71 ccw(c563.98,-359.82) v1@563.98,-387.95 ; v1(563.98,-388.78) 553.15,-388.78 509.61,-345.24 509.61,-83.42 ; JS6.2@572.52,0.98 cw(c520.62,0.98) 557.32,-35.71 cw(c594.02,-72.41) JS6.2@594.02,-20.51 ; 574.53,27.56 cw(c574.53,-18.5) JS6.2@607.1,14.07 ; JS6.2@587.13,-5.91 509.61,-83.42
  Mid-Layer 2 w20: v1(-712.01,-43.23) -712.01,-81.3 -579.72,-213.58 -514.76,-213.58 ; t103.1@-635.83,-334.65 -514.76,-213.58 ; t103.1@-635.83,-319.65 ccw(c-635.83,-283.43) -610.22,-309.04 ccw(c-584.61,-334.65) t103.1@-620.83,-334.65 ; v1@-629.52,364.57 cw(c-661.82,332.27) -616.14,332.27 ; v1@-629.17,364.36 cw(c-634.14,347.06) -616.14,347.06 ; v1(-628.94,365.16) -616.14,352.36 v1@-616.14,188.98 ; -615.16,185.99 -615.16,164.37 -551.18,100.39 -481.3,100.39 ; v1(-446.85,150.59) -424.21,127.95 ; v1(-418.9,-109.65) -358.27,-170.28 -266,-170.28 ; v1(-382.87,315.94) -382.87,325.79 -260.83,447.84 -172.25,536.41 -172.25,692.92 v1(-173.23,693.9) ; v1@-382.05,315.94 cw(c-356.28,315.94) -374.5,334.16 ; v1(-373.03,25.59) -393.21,45.77 ; v1@-372.42,25.03 cw(c-325.3,-18.15) -325.3,45.77 ; P1.1@-293.77,-634.11 -293.77,-598.89 -247.54,-552.66 ; -292.6,78.46 ccw(c-329.3,115.16) v1@-277.4,115.16 ; P1.1@-292.3,-633.86 cw(c-231.45,-623.79) -275.06,-580.18 ; v1(-276.57,115.16) -276.57,94.49 -325.3,45.77 ; P1.1@-272.56,-630.59 cw(c-184.23,-615.97) -247.54,-552.66 ; -225.15,483.52 cw(c-196.85,455.22) v1@-196.85,495.24 ; v1@-196.02,496.06 cw(c-156.01,496.06) -184.3,524.36 ; v1(-125,-79.72) -251.97,-79.72 -266,-93.76 -266,-170.28 ; v1(-85.63,-406.5) -85.63,-463.58 -191.93,-569.88 ; v1(21.65,-156.5) 90.55,-225.39 v1(149.61,-225.39) ; 62.99,188.98 74.8,177.16 v1(74.8,98.41) ; 74.8,158.47 cw(c117.12,158.47) v1@87.2,188.39 ; 74.8,172.27 cw(c91.33,172.27) v1@86.84,188.18 ; v1(241.14,479.33) 440.94,279.53 v1(451.77,279.53) ; v1(273.62,-628.94) 273.62,-598.43 240.16,-564.96 113.19,-564.96 110.24,-567.91 v1(34.45,-567.91) 2.95,-567.91 -59.25,-630.12 v1(-59.25,-700.98) -190.36,-569.88 -191.93,-569.88 ; v1(367.13,-573.82) 367.13,-476.38 454.72,-388.78 v1(563.98,-388.78) v1(600.39,-388.78) ; 431.88,288.59 ccw(c451.77,308.49) v1@451.77,280.35 ; -514.76,-213.58 -478.35,-177.17 -478.35,-68.9 -481.3,-65.94 -481.3,100.39 ; -481.3,100.39 -451.77,100.39 -424.21,127.95 ; -424.21,127.95 -416.34,120.08 -416.34,68.9 -393.21,45.77 ; -393.21,45.77 -325.3,45.77 ; -266,-170.28 -266,-447.58 v1(-262.8,-450.79) -262.8,-537.4 -247.54,-552.66 ; -247.54,-552.66 -230.32,-569.88 -191.93,-569.88
  Mid-Layer 2 w30: v1@-6.71,200.2 ccw(c9.95,206.95) 9.95,188.98 ; v1@-5.8,198.82 ccw(c17.97,222.59) 17.97,188.98 ; v1(-2.85,201.77) 9.95,188.98 ; v1(86.61,188.98) 62.99,188.98 9.95,188.98
  Bottom Layer w10: v1(-85.63,-406.5) -85.63,-398.62 v1(-23.62,-336.61) ; v1@-79.8,-406.5 cw(c-46.73,-406.5) -70.12,-383.11 ; v1@-29.45,-336.61 cw(c-43.52,-336.61) -33.57,-346.56 cw(c-23.62,-356.51) v1@-23.62,-342.44
  other v1: 181.1,-710.63 221.46,-689.96 -312.01,-454.72 650.59,-338.58 661.42,-273.62 672.24,-218.5 587.6,-204.72 351.38,26.57 351.38,83.66 509.84,142.72 400.59,143.7 718.5,148.62 445.87,180.12 697.83,205.71 665.35,274.61 625,367.13 -207.68,434.06 72.83,436.02 -100.39,488.19 -283.46,491.14 278.54,529.53 312.99,574.8 220.47,580.71 -284.45,606.3 133.86,611.22 -375.98,615.16 78.74,618.11 397.64,621.06 319.69,621.95 287.4,629.92 202.76,634.84 -1.97,644.69 -81.69,660.43 329.72,660.43 281.5,676.18 152.56,687.01 47.24,691.93 84.65,693.9 92.52,727.36 59.06,733.27
HMC-INT: U1.3
HW_LH: R20.2 U1.19 | length 1308.7
  Top Layer w7: v1@-673.49,205.45 cw(c-688.37,190.56) -667.32,190.56 ; R20.2@-671.81,177.71 ccw(c-682.63,188.54) -667.32,188.54 ccw(c-652.01,188.54) R20.2@-662.84,177.71 ; v1(-668.31,210.63) -667.32,209.64 R20.2@-667.32,173.23 ; -667.32,195.32 cw(c-653,195.32) v1@-663.13,205.45 ; v1(20.67,-211.61) 44.29,-187.99 44.29,-174.21 68.9,-149.61 U1.19@68.9,-106.3 ; v1@20.67,-204.29 ccw(c20.67,-186.6) 33.18,-199.11 ccw(c45.68,-211.61) v1@28,-211.61
  Bottom Layer w7: v1(-668.31,210.63) -665.35,210.63 -630.91,245.08 -285.47,245.08 -54.34,13.95 -54.34,-119.56 -46.35,-127.54 -46.35,-154.43 10.83,-211.61 v1(20.67,-211.61) ; v1@-668.31,217.96 ccw(c-668.31,242.77) -650.76,225.23 ; v1@-660.98,210.63 cw(c-650.42,210.63) -657.89,218.1 ; -8.64,-192.15 ccw(c20.67,-162.84) v1@20.67,-204.29 ; 3.31,-204.1 ccw(c20.67,-186.74) v1@20.67,-211.29